# EAGLE board Adapter-QFP-32-10 (EAGLE 5.06)
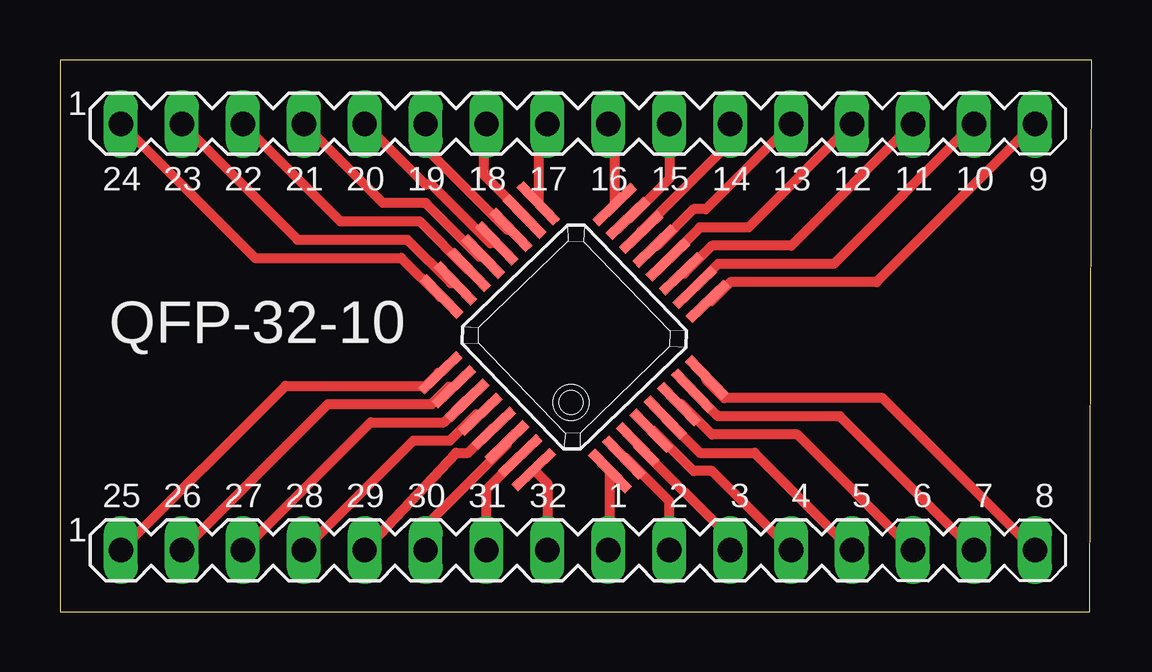
[diagram p0: board, top side]
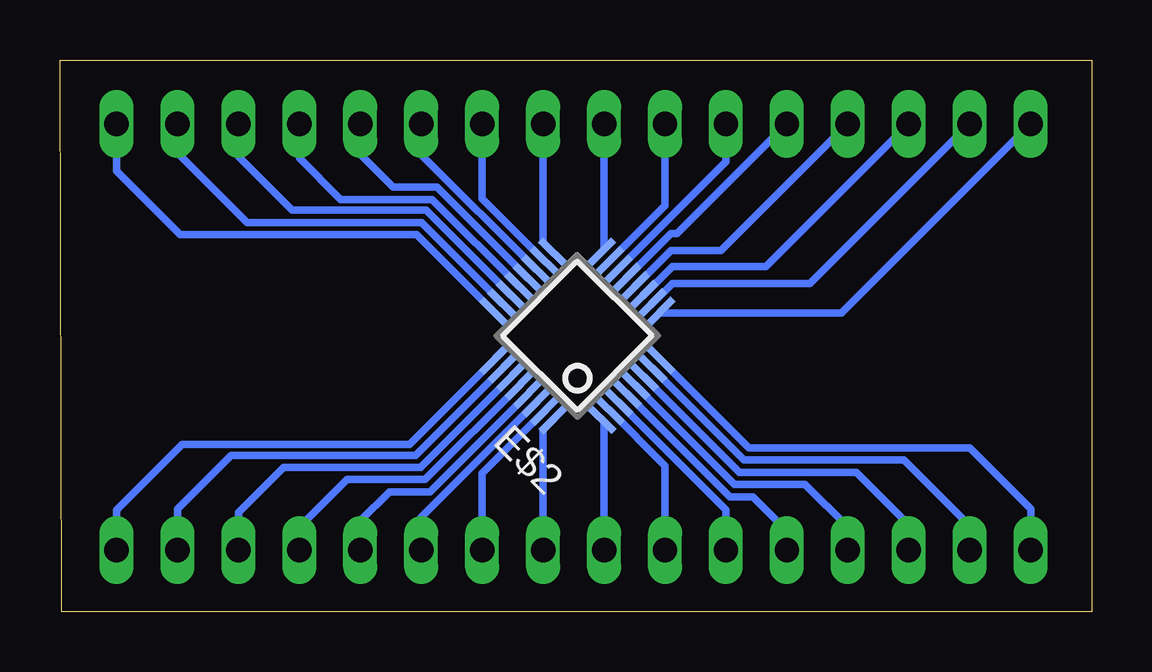
[diagram p1: board, bottom side, seen from below]

Size 43 x 23 mm. Coordinates in mm from the lower left corner, seen from the top.
Outline: 0,0 42.92,0 43,23 0,23 0,0
Copper layers (1*16): Top 0.035mm / dielectric 1.5mm / Bottom 0.035mm
Design rules "PCB-POOL": minimum track width 6mil, minimum drill 12mil, track to track 6mil, track to pad 6mil, pad to pad 6mil, via to via 6mil, smd to smd 6mil, copper to edge 20mil, drill to drill 8mil, minimum pad ring 8mil, minimum via ring 6mil, stop-mask expansion 3mil, vias tented up to drill 0mil, thermal gap 8mil
Net classes: 0 default: width 0.152 mm

## Footprints (pad centres in the part's own frame; a part is rotated, then mirrored left to right if it is on the bottom)
MA16-1 = drill 1.016 long: 1 -17.78,0; 2 -15.24,0; 3 -12.7,0; 4 -10.16,0; 5 -7.62,0; 6 -5.08,0; 7 -2.54,0; 8 0,0; 9 2.54,0; 10 5.08,0; 11 7.62,0; 12 10.16,0; 13 12.7,0; 14 15.24,0; 15 17.78,0; 16 20.32,0
QFP-32 = smd 0.4 x 2.2: 1 -2.4,-4.65; 2 -1.6,-4.65; 3 -0.8,-4.65; 4 0,-4.65; 5 0.8,-4.65; 6 1.6,-4.65; 7 2.4,-4.65; 8 3.2,-4.65; 17 3.2,5.45; 18 2.4,5.45; 19 1.6,5.45; 20 0.8,5.45; 21 0,5.45; 22 -0.8,5.45; 23 -1.6,5.45; 24 -2.4,5.45 | smd 2.2 x 0.4: 9 5.45,-2.4; 10 5.45,-1.6; 11 5.45,-0.8; 12 5.45,0; 13 5.45,0.8; 14 5.45,1.6; 15 5.45,2.4; 16 5.45,3.2; 25 -4.65,3.2; 26 -4.65,2.4; 27 -4.65,1.6; 28 -4.65,0.8; 29 -4.65,0; 30 -4.65,-0.8; 31 -4.65,-1.6; 32 -4.65,-2.4
SQFP-S-5X5-32 = smd 0.3 x 1.6: 1 -1.75,-3.1; 2 -1.25,-3.1; 3 -0.75,-3.1; 4 -0.25,-3.1; 5 0.25,-3.1; 6 0.75,-3.1; 7 1.25,-3.1; 8 1.75,-3.1; 17 1.75,3.1; 18 1.25,3.1; 19 0.75,3.1; 20 0.25,3.1; 21 -0.25,3.1; 22 -0.75,3.1; 23 -1.25,3.1; 24 -1.75,3.1 | smd 1.6 x 0.3: 9 3.1,-1.75; 10 3.1,-1.25; 11 3.1,-0.75; 12 3.1,-0.25; 13 3.1,0.25; 14 3.1,0.75; 15 3.1,1.25; 16 3.1,1.75; 25 -3.1,1.75; 26 -3.1,1.25; 27 -3.1,0.75; 28 -3.1,0.25; 29 -3.1,-0.25; 30 -3.1,-0.75; 31 -3.1,-1.25; 32 -3.1,-1.75

## Placement (x,y rotation side)
1-16  MA16  [MA16-1]  20.32,20.34 0 top
17-32  MA16  [MA16-1]  20.32,2.56 0 top
E$1  [QFP-32]  21.42,10.88 44 top
E$2  [SQFP-S-5X5-32]  21.44,11.5 45.1 bottom

## Library data of the parts
1-16 17-32 = turbod3
E$1 E$2 = ref-packages

## Nets
N$1: 1-16.1 E$1.24 E$2.9
N$2: 1-16.2 E$1.23 E$2.10
N$3: 1-16.3 E$1.22 E$2.11
N$4: 1-16.4 E$1.21 E$2.12
N$5: 1-16.5 E$1.20 E$2.13
N$6: 1-16.6 E$1.19 E$2.14
N$7: 1-16.7 E$1.18 E$2.15
N$8: 1-16.8 E$1.17 E$2.16
N$9: 1-16.9 E$1.16 E$2.17
N$10: 1-16.10 E$1.15 E$2.18
N$11: 1-16.11 E$1.14 E$2.19
N$12: 1-16.12 E$1.13 E$2.20
N$13: 1-16.13 E$1.12 E$2.21
N$14: 1-16.14 E$1.11 E$2.22
N$15: 1-16.15 E$1.10 E$2.23
N$16: 1-16.16 E$1.9 E$2.24
N$17: 17-32.1 E$1.25 E$2.8
N$18: 17-32.2 E$1.26 E$2.7
N$19: 17-32.3 E$1.27 E$2.6
N$20: 17-32.4 E$1.28 E$2.5
N$21: 17-32.5 E$1.29 E$2.4
N$22: 17-32.6 E$1.30 E$2.3
N$23: 17-32.7 E$1.31 E$2.2
N$24: 17-32.8 E$1.32 E$2.1
N$25: 17-32.9 E$1.1 E$2.32
N$26: 17-32.10 E$1.2 E$2.31
N$27: 17-32.11 E$1.3 E$2.30
N$28: 17-32.12 E$1.4 E$2.29
N$29: 17-32.13 E$1.5 E$2.28
N$30: 17-32.14 E$1.6 E$2.27
N$31: 17-32.15 E$1.7 E$2.26
N$32: 17-32.16 E$1.8 E$2.25

## Tracks (layer width: path | path; a pad name or v marks a point on that pad's centre or on a via)
N$1
  Top 0.406: E$1.24 15.84,13.13 14.22,14.75 8.13,14.75 1-16.1
  Bottom 0.305: E$2.9 10.42,12.46 1-16.1
N$2
  Top 0.406: E$1.23 16.3,13.69 14.48,15.51 9.91,15.51 1-16.2
  Bottom 0.305: E$2.10 18.35,12.81 17.48,13.68 11.73,13.68 1-16.2
N$3
  Top 0.406: E$1.22 17.01,14.24 14.99,16.27 11.68,16.27 1-16.3
  Bottom 0.305: E$2.11 18.7,13.16 17.48,14.39 13.56,14.39 1-16.3
N$4
  Top 0.406: E$1.21 17.47,14.8 15.24,17.03 13.46,17.03 1-16.4
  Bottom 0.305: E$2.12 17.53,15.05 15.44,15.05 1-16.4
N$5
  Top 0.406: E$1.20 17.93,15.36 15.49,17.8 15.24,17.8 1-16.5
  Bottom 0.305: E$2.13 17.53,15.76 17.27,15.76 1-16.5
N$6
  Top 0.406: E$1.19 18.65,15.91 15.24,19.32 1-16.6
  Bottom 0.305: E$2.14 16.97,17.03 15.24,18.76 1-16.6
N$7
  Top 0.406: E$1.18 19.36,16.52 17.68,18.2 17.68,20.23 1-16.7
  Bottom 0.305: E$2.15 17.78,16.93 1-16.7
N$8
  Top 0.406: E$1.17 19.94,19.95 1-16.8
  Bottom 0.305: E$2.16 20.32,15.1 1-16.8
N$9
  Top 0.406: E$1.16 23.12,20.08 1-16.9
  Bottom 0.305: E$2.17 22.86,15.39 1-16.9
N$10
  Top 0.406: E$1.15 23.74,16.39 25.4,18.05 1-16.10
  Bottom 0.305: E$2.18 25.4,17.22 1-16.10
N$11
  Top 0.406: E$1.14 24.23,15.86 27.94,19.57 1-16.11
  Bottom 0.305: E$2.19 27.94,19.05 1-16.11
N$12
  Top 0.406: E$1.13 24.88,15.24 26.42,16.78 26.92,16.78 1-16.12
  Bottom 0.305: E$2.20 27.29,17.69 29.11,17.69 30.48,19.07 1-16.12
N$13
  Top 0.406: E$1.12 25.34,14.69 26.67,16.02 28.7,16.02 1-16.13
  Bottom 0.305: E$2.21 27.49,17.19 31.29,17.19 33.02,18.91 1-16.13
N$14
  Top 0.406: E$1.11 26.01,14.09 27.18,15.26 30.48,15.26 1-16.14
  Bottom 0.305: E$2.22 27.74,16.73 33.33,16.73 35.56,18.96 1-16.14
N$15
  Top 0.406: E$1.10 27.43,14.49 32.26,14.49 1-16.15
  Bottom 0.305: E$2.23 27.94,16.22 35.2,16.22 38.1,19.12 1-16.15
N$16
  Top 0.406: E$1.9 27.15,12.94 27.94,13.73 34.04,13.73 1-16.16
  Bottom 0.305: E$2.24 28.14,15.71 38,15.71 40.64,18.36 1-16.16
N$17
  Top 0.406: E$1.25 15.78,9.95 15.24,9.41 9.4,9.41 17-32.1
  Bottom 0.305: E$2.8 14.28,6.82 5.08,6.82 2.54,4.28 17-32.1
N$18
  Top 0.406: E$1.26 16.22,9.38 15.49,8.65 11.18,8.65 17-32.2
  Bottom 0.305: E$2.7 14.48,6.32 7.82,6.32 5.08,3.57 17-32.2
N$19
  Top 0.406: E$1.27 16.91,8.8 16,7.89 12.95,7.89 17-32.3
  Bottom 0.305: E$2.6 14.68,5.81 9.8,5.81 7.62,3.62 17-32.3
N$20
  Top 0.406: E$1.28 17.35,8.22 16.26,7.13 14.73,7.13 17-32.4
  Bottom 0.305: E$2.5 14.88,5.3 11.94,5.3 10.16,3.52 17-32.4
N$21
  Top 0.406: E$1.29 18.05,7.65 17.02,6.62 16.51,6.62 17-32.5
  Bottom 0.305: E$2.4 15.08,4.79 14.12,4.79 12.7,3.37 17-32.5
N$22
  Top 0.406: E$1.30 18.63,6.96 15.24,3.57 17-32.6
  Bottom 0.305: E$2.3 15.24,4.25 17-32.6
N$23
  Top 0.406: E$1.31 17.78,5.1 17-32.7
  Bottom 0.305: E$2.2 17.78,6.08 17-32.7
N$24
  Top 0.406: E$1.32 20.32,5.35 17-32.8
  Bottom 0.305: E$2.1 20.32,7.91 17-32.8
N$25
  Top 0.406: E$1.1 22.93,2.62 17-32.9
  Bottom 0.305: E$2.32 22.86,7.59 17-32.9
N$26
  Top 0.406: E$1.2 23.57,6.42 25.4,4.59 17-32.10
  Bottom 0.305: E$2.31 25.4,5.76 17-32.10
N$27
  Top 0.406: E$1.3 24.08,6.93 27.94,3.06 17-32.11
  Bottom 0.305: E$2.30 27.94,3.93 17-32.11
N$28
  Top 0.406: E$1.4 24.74,7.54 26.42,5.86 27.18,5.86 17-32.12
  Bottom 0.305: E$2.29 27.58,4.99 29.26,4.99 30.48,3.78 17-32.12
N$29
  Top 0.406: E$1.5 25.23,8.06 26.67,6.62 28.96,6.62 17-32.13
  Bottom 0.305: E$2.28 27.78,5.5 31.04,5.5 33.02,3.52 17-32.13
N$30
  Top 0.406: E$1.6 25.91,8.65 27.18,7.38 30.73,7.38 17-32.14
  Bottom 0.305: E$2.27 27.98,6.01 33.68,6.01 35.56,4.13 17-32.14
N$31
  Top 0.406: E$1.7 27.43,8.14 32.51,8.14 17-32.15
  Bottom 0.305: E$2.26 28.18,6.52 35.87,6.52 38.1,4.28 17-32.15
N$32
  Top 0.406: E$1.8 26.95,9.64 27.69,8.91 34.29,8.91 17-32.16
  Bottom 0.305: E$2.25 28.43,6.98 37.9,6.98 40.64,4.23 17-32.16

## Text on the board
tNames: 24 | 23 | 22 | 21 | 20 | 19 | 18 | 17 | 16 | 15 | 14 | 13 | 12 | 11 | 10 | 9 | QFP-32-10 | 25 | 26 | 27 | 28 | 29 | 30 | 31 | 32 | 1 | 2 | 3 | 4 | 5 | 6 | 7 | 8